# Altium PCB 电源母板.PcbDoc
Units mil, origin at the board's own origin, x right, y up, seen from the top; angles counter-clockwise.
Board outline 6000 x 4000 mil, 2 copper layers (Top Layer, Bottom Layer); 16 components, 11 nets, 72 pads, 228 vias.
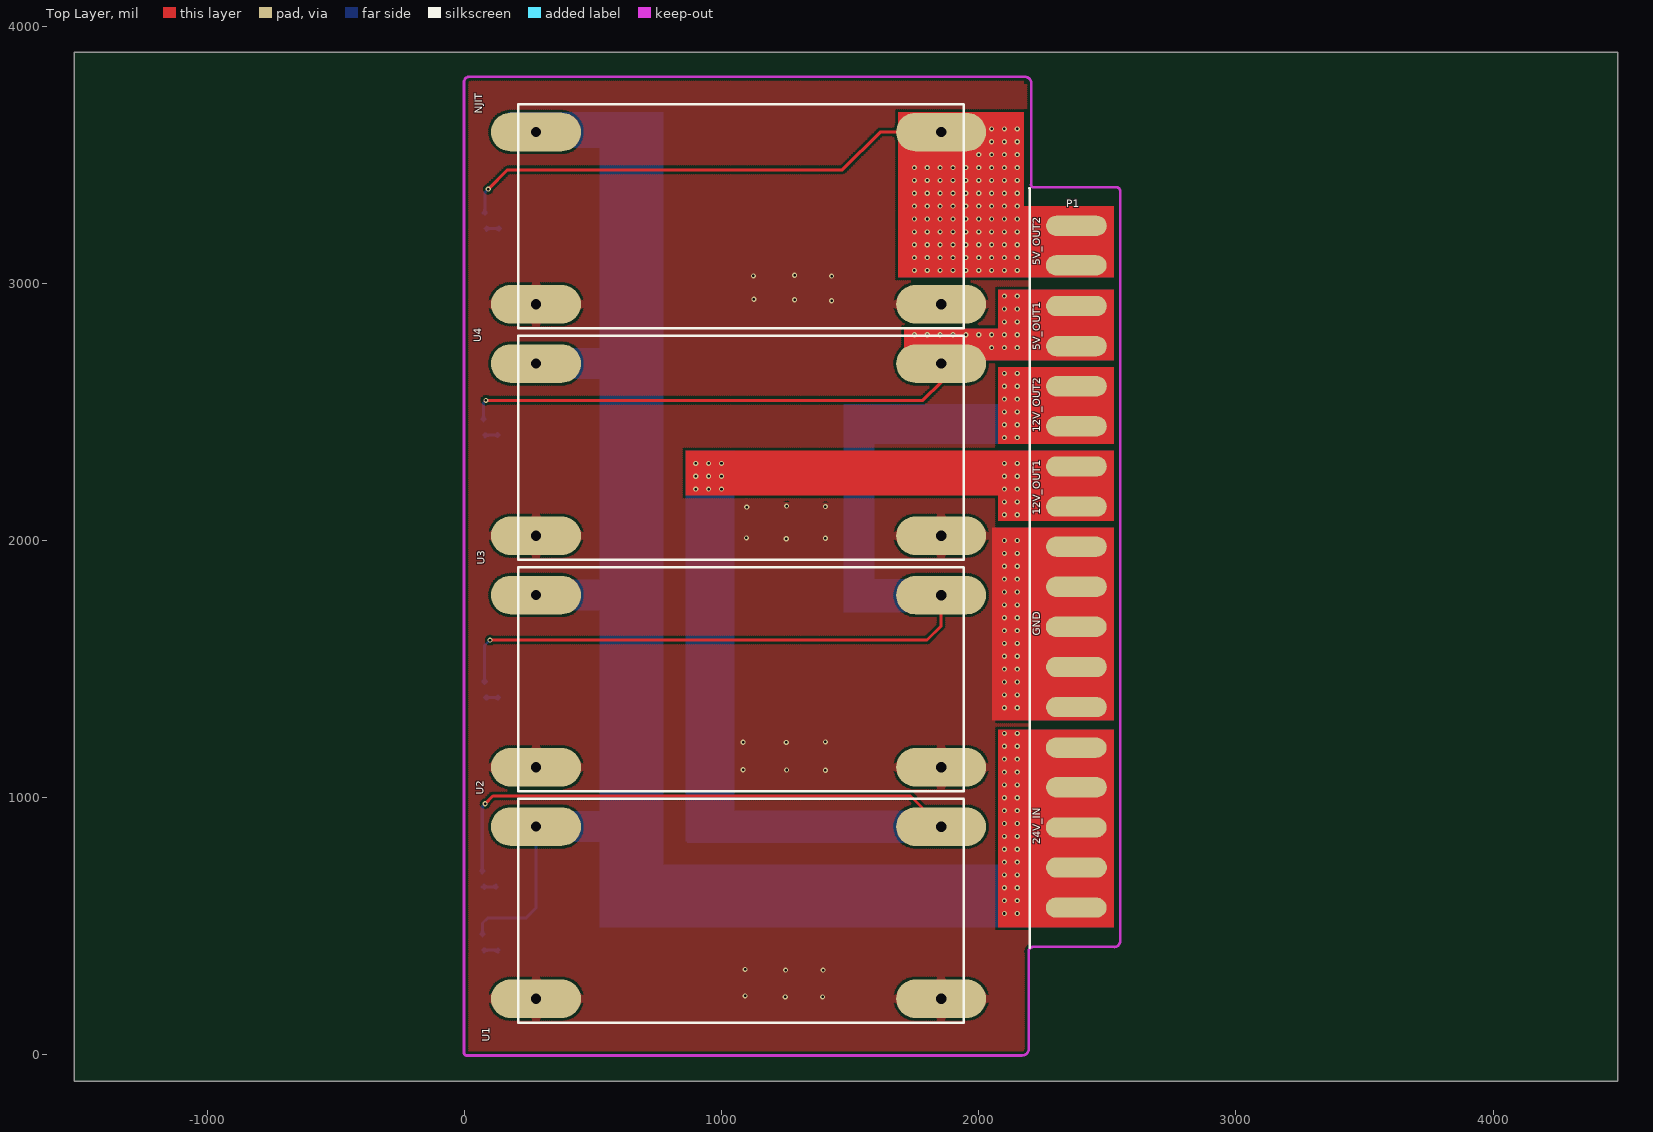
[diagram p0: Top Layer view]
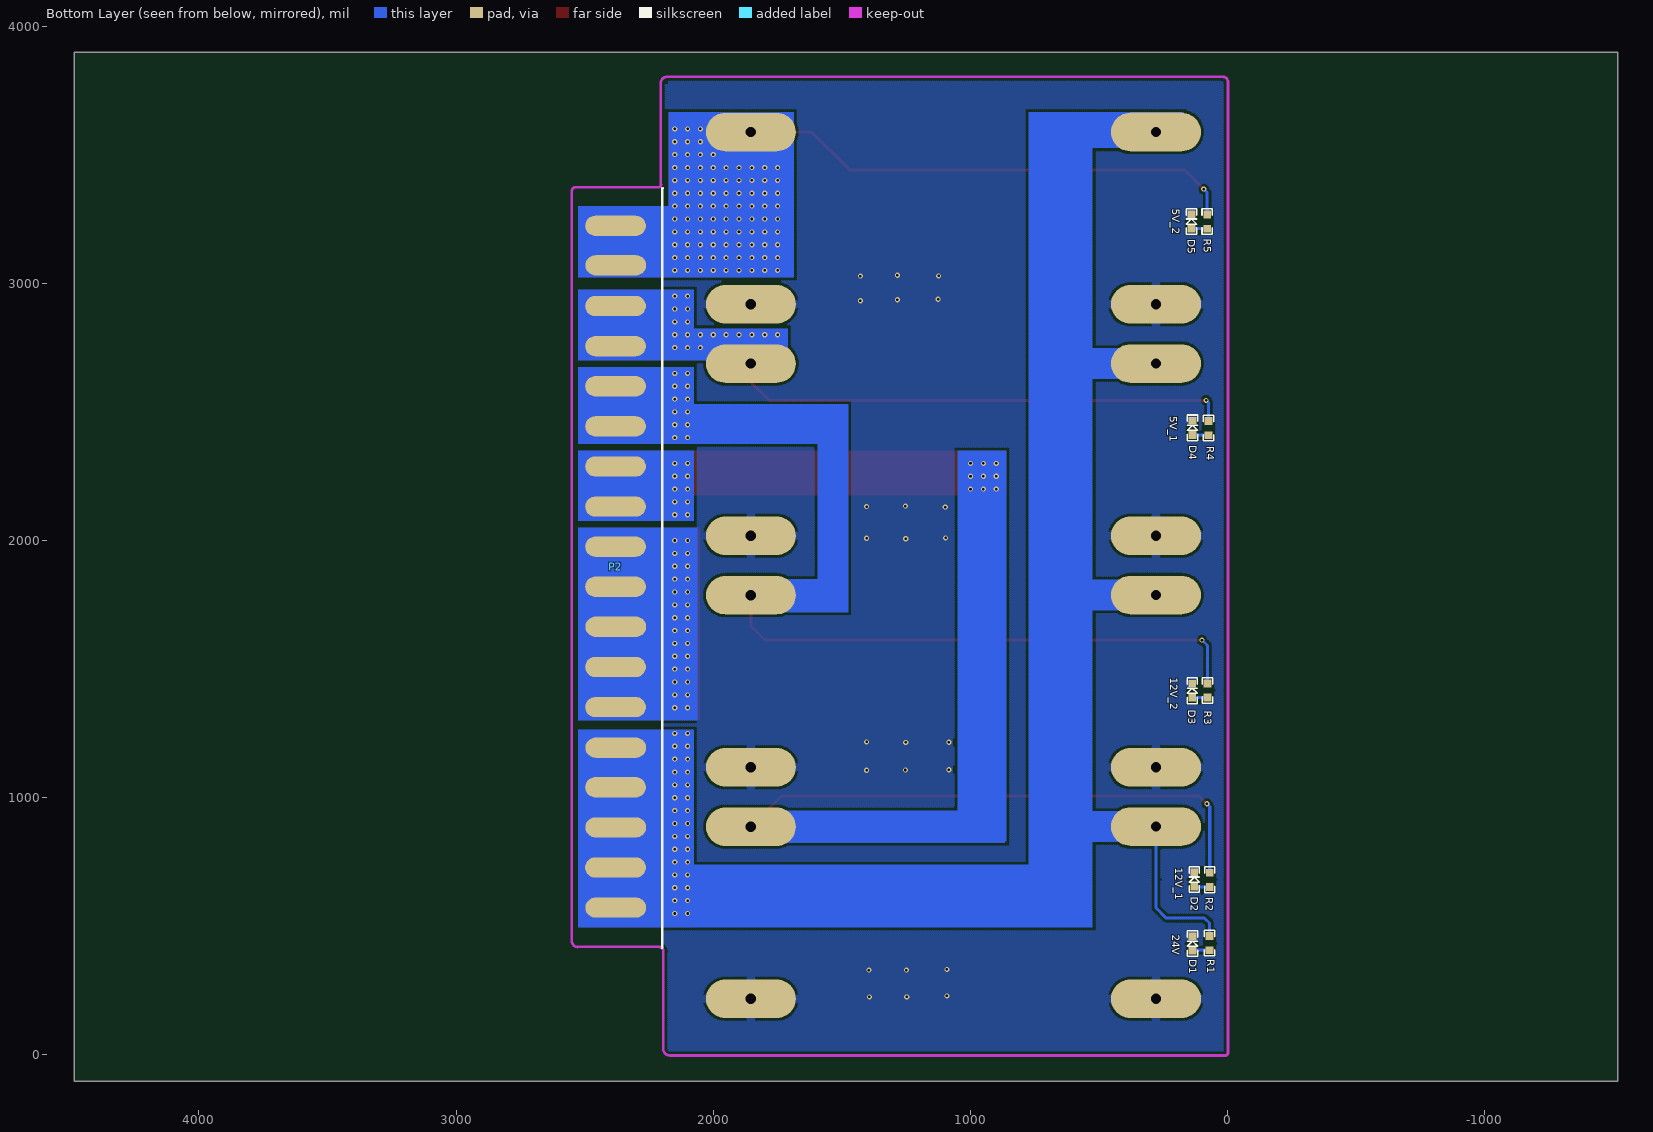
[diagram p1: Bottom Layer view, seen from below]

## Layer stack, top to bottom
Top Layer: signal copper 1.4
Dielectric: dielectric 12.6, FR-4, Dk 4.8
Bottom Layer: signal copper 1.4

## Board outline
-1516,-102 4484,-102 4484,3898 -1516,3898

## Design rules (kind name [scope] priority, off if disabled: settings)
Clearance [All] p1: gap=10
PlaneConnect [All] p1: planeconnectstyle=Relief reliefexpansion=20 reliefentries=4 reliefconductorwidth=30 reliefairgap=20
PolygonConnect [All] p1: connectstyle=Relief reliefconductorwidth=30 reliefentries=4 polygonreliefangle="90 Angle"
RoutingVias [All] p1: holewidth=28 width=50 viastyle="Through Hole" minholewidth=28 minwidth=50 maxholewidth=28 maxwidth=50
SilkscreenOverComponentPads [All] p1: minsilkscreentomaskgap=10
SolderMaskExpansion [All] p1: expansion=4
Width [All] p1: maxlimit=200 minlimit=10 preferedwidth=30
26 further rules are at their usual default settings.

## Components (designator, comment, footprint, x,y, rotation, side; value= is the part's Value field where it differs from the comment)
D1 "D_LED 3MM" 0603_LED 137,433 r90 bottom
D2 "D_LED 3MM" 0603_LED 130,682 r90 bottom
D3 "D_LED 3MM" 0603_LED 138,1416 r90 bottom
D4 "D_LED 3MM" 0603_LED 137,2438 r90 bottom
D5 "D_LED 3MM" 0603_LED 141,3240 r90 bottom
P1 "正" 1X16#1 2379,573 r0 top
P2 "反" 1X16#2 2379,573 r0 bottom
R1 "RES" 0603 71,435 r90 bottom
R2 "RES" 0603 70,681 r90 bottom
R3 "RES" 0603 79,1417 r90 bottom
R4 "RES" 0603 75,2437 r90 bottom
R5 "RES" 0603 80,3240 r90 bottom
U1 "12V" LM2596稳压模块 279,888 r90 top
U2 "12V" LM2596稳压模块 279,1788 r90 top
U3 "5V" LM2596稳压模块 279,2688 r90 top
U4 "5V" LM2596稳压模块 279,3588 r90 top

## Footprints (in the part's own frame and the unit in brackets; to place one, negate y for a bottom-side part, rotate by r counter-clockwise, add the part's x,y. Pads: shape width x height; smd on the part's side, far side on the other; paste and mask are expansions set on the pad)
1X16#1 [mm]
  oval 6x2 smd: 1(0,0) 2(0.024,3.96) 3(0.001,7.92) 4(0.022,11.88) 5(0,15.795) 6(0.022,19.8) 7(0.022,23.76) 8(0,27.733) 9(0.022,31.68) 10(0.022,35.64) 11(0.022,39.6) 12(0.022,43.56) 13(0.022,47.52) 14(0.022,51.48) 15(0.022,55.44) 16(0.022,59.4) 17(0,63.42) 18(0.022,67.32)
  silkscreen extent -4.62,-3.96 -4.61,71.04
1X16#2 [mm]
  oval 6x2 smd: 1(0,0) 2(0.024,-3.96) 3(0.001,-7.92) 4(0.022,-11.88) 5(0,-15.795) 6(0.022,-19.8) 7(0.022,-23.76) 8(0,-27.733) 9(0.022,-31.68) 10(0.022,-35.64) 11(0.022,-39.6) 12(0.022,-43.56) 13(0.022,-47.52) 14(0.022,-51.48) 15(0.022,-55.44) 16(0.022,-59.4) 17(0,-63.42) 18(0.022,-67.32)
  silkscreen extent -4.62,-71.04 -4.61,3.96
0603 [mil] "Chip Inductor, 2-Leads, Body 1.6x0.8mm, IPC Medium Density"
  rect 30x30 smd: 1(-27.5,0) 2(27.5,0)
  silkscreen extent -50,-20 50,20
0603_LED [mil]
  rect 30x30 smd: 1(-27.5,0) 2(27.5,0)
  silkscreen extent -50,-20 50,20
LM2596稳压模块 [mm]
  oval 3.81x8.89 hole 1.016: 1(0,0) 2(-17,0) 3(-0.005,-40) 4(-17,-40)
  silkscreen extent -19.39,-42.25 2.75,1.75

## Part data
P1 P2: library part 1X18, "1X18"
U1 U2 U3 U4: library part 稳压模块, "稳压模块"

## Via types
v1: diameter 20, hole 10, Top Layer to Bottom Layer, 228 vias

## Nets (pads, with @x,y where several pads share a name; then routed paths per layer and width w, separated by ;. In a path a pad name is that pad's centre, name@x,y a point inside that pad or via, vN(x,y) a via of type N, cw(c..) or ccw(c..) an arc to the next point about the centre after c; other vN are vias at no path point)
5V_OUT1: P1.15 P1.16 P2.15 P2.16 R4.2 U3.3 | length 2091.9
  Top Layer w12: v1(84,2545) 1783,2545 1853.8,2615.8 U3.3
  Bottom Layer w12: R4.2 75,2536 v1(84,2545) ; R4.2@68.64,2470.86 ccw(c53.27,2486.23) 75,2486.23 ; R4.2@68.64,2470.86 ccw(c53.27,2486.23) 75,2486.23 ; R4.2@68.64,2470.86 ccw(c53.27,2486.23) 75,2486.23 ; R4.2@68.64,2470.86 ccw(c53.27,2486.23) 75,2486.23 ; 75,2486.23 ccw(c96.73,2486.23) R4.2@81.36,2470.86 ; 75,2486.23 ccw(c96.73,2486.23) R4.2@81.36,2470.86 ; 75,2486.23 ccw(c96.73,2486.23) R4.2@81.36,2470.86 ; 75,2486.23 ccw(c96.73,2486.23) R4.2@81.36,2470.86
  other v1: 2050,2750 2100,2750 2150,2750 1750,2800 1800,2800 1850,2800 1900,2800 1950,2800 2000,2800 2050,2800 2100,2800 2150,2800 2100,2850 2150,2850 2100,2900 2150,2900 2100,2950 2150,2950
5V_OUT2: P1.17 P1.18 P2.17 P2.18 R5.2 U4.3 | length 2093.1
  Top Layer w12: v1(93,3366) 168,3441 1470,3441 1616.8,3587.8 U4.3
  Bottom Layer w12: R5.2 80,3353 v1(93,3366) ; R5.2@73.64,3273.86 ccw(c58.27,3289.23) 80,3289.23 ; R5.2@73.64,3273.86 ccw(c58.27,3289.23) 80,3289.23 ; R5.2@73.64,3273.86 ccw(c58.27,3289.23) 80,3289.23 ; R5.2@73.64,3273.86 ccw(c58.27,3289.23) 80,3289.23 ; 80,3289.23 ccw(c101.73,3289.23) R5.2@86.36,3273.86 ; 80,3289.23 ccw(c101.73,3289.23) R5.2@86.36,3273.86 ; 80,3289.23 ccw(c101.73,3289.23) R5.2@86.36,3273.86 ; 80,3289.23 ccw(c101.73,3289.23) R5.2@86.36,3273.86
  other v1: 1750,3050 1800,3050 1850,3050 1900,3050 1950,3050 2000,3050 2050,3050 2100,3050 2150,3050 1750,3100 1800,3100 1850,3100 1900,3100 1950,3100 2000,3100 2050,3100 2050,3100 2100,3100 2150,3100 1750,3150 1800,3150 1850,3150 1900,3150 1950,3150 2000,3150 2050,3150 2100,3150 2150,3150 1750,3200 1800,3200 1850,3200 1900,3200 1950,3200 2000,3200 2050,3200 2100,3200 2150,3200 1750,3250 1800,3250 1850,3250 1900,3250 1950,3250 2000,3250 2050,3250 2100,3250 2150,3250 1750,3300 1800,3300 1850,3300 1900,3300 1950,3300 2000,3300 2050,3300 2100,3300 2150,3300 1750,3350 1800,3350 1850,3350 1900,3350 1950,3350 2000,3350 2050,3350 2100,3350 2150,3350 1750,3400 1800,3400 1850,3400 1900,3400 1950,3400 2000,3400 2050,3400 2100,3400 2150,3400 1750,3450 1800,3450 1850,3450 1900,3450 1950,3450 2000,3450 2050,3450 2100,3450 2150,3450 2000,3500 2000,3500 2050,3500 2100,3500 2150,3500 2050,3550 2100,3550 2150,3550 2050,3600 2100,3600 2150,3600
12V_OUT1: P1.11 P1.12 P2.11 P2.12 R2.2 U1.3 | length 2244.2
  Top Layer w12: v1(81,977) 111,1007 1734.61,1007 U1.3
  Bottom Layer w12: R2.2 70,966 v1(81,977) ; R2.2@63.64,714.86 ccw(c48.27,730.23) 70,730.23 ; R2.2@63.64,714.86 ccw(c48.27,730.23) 70,730.23 ; R2.2@63.64,714.86 ccw(c48.27,730.23) 70,730.23 ; R2.2@63.64,714.86 ccw(c48.27,730.23) 70,730.23 ; 70,730.23 ccw(c91.73,730.23) R2.2@76.36,714.86 ; 70,730.23 ccw(c91.73,730.23) R2.2@76.36,714.86 ; 70,730.23 ccw(c91.73,730.23) R2.2@76.36,714.86 ; 70,730.23 ccw(c91.73,730.23) R2.2@76.36,714.86
  other v1: 2100,2100 2150,2100 2100,2150 2150,2150 900,2200 950,2200 1000,2200 2100,2200 2150,2200 900,2250 950,2250 1000,2250 2100,2250 2150,2250 900,2300 950,2300 1000,2300 2100,2300 2150,2300
12V_OUT2: P1.13 P1.14 P2.13 P2.14 R3.2 U2.3 | length 2210.2
  Top Layer w12: v1(100,1613) 1799,1613 1853.8,1667.8 U2.3
  Bottom Layer w12: R3.2 79,1592 v1(100,1613) ; R3.2@72.64,1450.86 ccw(c57.27,1466.23) 79,1466.23 ; R3.2@72.64,1450.86 ccw(c57.27,1466.23) 79,1466.23 ; R3.2@72.64,1450.86 ccw(c57.27,1466.23) 79,1466.23 ; R3.2@72.64,1450.86 ccw(c57.27,1466.23) 79,1466.23 ; 79,1466.23 ccw(c100.73,1466.23) R3.2@85.36,1450.86 ; 79,1466.23 ccw(c100.73,1466.23) R3.2@85.36,1450.86 ; 79,1466.23 ccw(c100.73,1466.23) R3.2@85.36,1450.86 ; 79,1466.23 ccw(c100.73,1466.23) R3.2@85.36,1450.86
  other v1: 2100,2400 2150,2400 2100,2450 2150,2450 2100,2500 2150,2500 2100,2550 2150,2550 2100,2600 2150,2600 2100,2650 2150,2650
24V_IN: P1.1 P1.2 P1.3 P1.4 P1.5 P2.1 P2.2 P2.3 P2.4 P2.5 R1.2 U1.1 U2.1 U3.1 U4.1 | length 1690.3
  Bottom Layer w12: R1.2 71,513 90,532 239,532 279,572 U1.1 ; R1.2@64.64,468.86 ccw(c49.27,484.23) 71,484.23 ; R1.2@64.64,468.86 ccw(c49.27,484.23) 71,484.23 ; R1.2@64.64,468.86 ccw(c49.27,484.23) 71,484.23 ; 71,484.23 ccw(c92.73,484.23) R1.2@77.36,468.86 ; 71,484.23 ccw(c92.73,484.23) R1.2@77.36,468.86 ; 71,484.23 ccw(c92.73,484.23) R1.2@77.36,468.86
  Bottom Layer w120: U1.1 602,888 ; U2.1 597,1788 ; U3.1 627,2688
  other v1: 2100,550 2150,550 2100,600 2150,600 2100,650 2150,650 2100,700 2150,700 2100,750 2150,750 2100,800 2150,800 2100,850 2150,850 2100,900 2150,900 2100,950 2150,950 2100,1000 2150,1000 2100,1050 2150,1050 2100,1100 2150,1100 2100,1150 2150,1150 2100,1200 2150,1200 2100,1250 2150,1250
GND: D1.2 D2.2 D3.2 D4.2 D5.2 P1.6 P1.7 P1.8 P1.9 P1.10 P2.6 P2.7 P2.8 P2.9 P2.10 U1.2 U1.4 U2.2 U2.4 U3.2 U3.4 U4.2 U4.4
  other v1: 1248,226 1393,226 1092,230 1249,330 1395,330 1092,333 1404,1107 1253,1108 1084,1109 1252,1215 1084,1216 1404,1217 2100,1350 2150,1350 2100,1400 2150,1400 2100,1450 2150,1450 2100,1500 2150,1500 2100,1550 2150,1550 2100,1600 2150,1600 2100,1650 2150,1650 2100,1700 2150,1700 2100,1750 2150,1750 2100,1800 2150,1800 2100,1850 2150,1850 2100,1900 2150,1900 2100,1950 2150,1950 2100,2000 2150,2000 1252,2007 1404,2009 1097,2010 1098,2130 1404,2132 1253,2134 1428,2932 1284,2936 1126,2938 1428,3028 1124,3029 1284,3031
NetD1_1: D1.1 R1.1 | length 337
  Bottom Layer w12: R1.1 D1.1@135,407.5 ; R1.1@77.36,401.14 cw(c92.73,385.77) 92.73,407.5 ; R1.1@77.36,401.14 cw(c92.73,385.77) 92.73,407.5 ; R1.1@77.36,401.14 cw(c92.73,385.77) 92.73,407.5 ; R1.1@77.36,401.14 cw(c92.73,385.77) 92.73,407.5 ; R1.1@77.36,413.86 ccw(c92.73,429.23) 92.73,407.5 ; R1.1@77.36,413.86 ccw(c92.73,429.23) 92.73,407.5 ; R1.1@77.36,413.86 ccw(c92.73,429.23) 92.73,407.5 ; R1.1@77.36,413.86 ccw(c92.73,429.23) 92.73,407.5 ; 110.44,407.5 cw(c110.44,378.94) D1.1@130.64,399.14 ; 110.44,407.5 cw(c110.44,378.94) D1.1@130.64,399.14 ; 110.44,407.5 cw(c110.44,378.94) D1.1@130.64,399.14 ; 110.44,407.5 cw(c110.44,378.94) D1.1@130.64,399.14 ; 120.1,407.5 ccw(c120.1,422.4) D1.1@130.64,411.86 ; 120.1,407.5 ccw(c120.1,422.4) D1.1@130.64,411.86 ; 120.1,407.5 ccw(c120.1,422.4) D1.1@130.64,411.86 ; 120.1,407.5 ccw(c120.1,422.4) D1.1@130.64,411.86
NetD2_1: D2.1 R2.1 | length 332
  Bottom Layer w12: R2.1 D2.1@129,653.5 ; R2.1@76.36,647.14 cw(c91.73,631.77) 91.73,653.5 ; R2.1@76.36,647.14 cw(c91.73,631.77) 91.73,653.5 ; R2.1@76.36,647.14 cw(c91.73,631.77) 91.73,653.5 ; R2.1@76.36,647.14 cw(c91.73,631.77) 91.73,653.5 ; R2.1@76.36,659.86 ccw(c91.73,675.23) 91.73,653.5 ; R2.1@76.36,659.86 ccw(c91.73,675.23) 91.73,653.5 ; R2.1@76.36,659.86 ccw(c91.73,675.23) 91.73,653.5 ; R2.1@76.36,659.86 ccw(c91.73,675.23) 91.73,653.5 ; 105.86,653.5 ccw(c105.86,678.64) D2.1@123.64,660.86 ; 105.86,653.5 ccw(c105.86,678.64) D2.1@123.64,660.86 ; 105.86,653.5 ccw(c105.86,678.64) D2.1@123.64,660.86 ; 105.86,653.5 ccw(c105.86,678.64) D2.1@123.64,660.86 ; 110.69,653.5 cw(c110.69,635.19) D2.1@123.64,648.14 ; 110.69,653.5 cw(c110.69,635.19) D2.1@123.64,648.14 ; 110.69,653.5 cw(c110.69,635.19) D2.1@123.64,648.14 ; 110.69,653.5 cw(c110.69,635.19) D2.1@123.64,648.14
NetD3_1: D3.1 R3.1 | length 331
  Bottom Layer w12: R3.1 D3.1@137,1389.5 ; R3.1@85.36,1383.14 cw(c100.73,1367.77) 100.73,1389.5 ; R3.1@85.36,1383.14 cw(c100.73,1367.77) 100.73,1389.5 ; R3.1@85.36,1383.14 cw(c100.73,1367.77) 100.73,1389.5 ; R3.1@85.36,1383.14 cw(c100.73,1367.77) 100.73,1389.5 ; R3.1@85.36,1395.86 ccw(c100.73,1411.23) 100.73,1389.5 ; R3.1@85.36,1395.86 ccw(c100.73,1411.23) 100.73,1389.5 ; R3.1@85.36,1395.86 ccw(c100.73,1411.23) 100.73,1389.5 ; R3.1@85.36,1395.86 ccw(c100.73,1411.23) 100.73,1389.5 ; 113.86,1389.5 cw(c113.86,1364.36) D3.1@131.64,1382.14 ; 113.86,1389.5 cw(c113.86,1364.36) D3.1@131.64,1382.14 ; 113.86,1389.5 cw(c113.86,1364.36) D3.1@131.64,1382.14 ; 113.86,1389.5 cw(c113.86,1364.36) D3.1@131.64,1382.14 ; 118.69,1389.5 ccw(c118.69,1407.81) D3.1@131.64,1394.86 ; 118.69,1389.5 ccw(c118.69,1407.81) D3.1@131.64,1394.86 ; 118.69,1389.5 ccw(c118.69,1407.81) D3.1@131.64,1394.86 ; 118.69,1389.5 ccw(c118.69,1407.81) D3.1@131.64,1394.86
NetD4_1: D4.1 R4.1 | length 334
  Bottom Layer w12: R4.1 D4.1@136,2409.5 ; R4.1@81.36,2403.14 cw(c96.73,2387.77) 96.73,2409.5 ; R4.1@81.36,2403.14 cw(c96.73,2387.77) 96.73,2409.5 ; R4.1@81.36,2403.14 cw(c96.73,2387.77) 96.73,2409.5 ; R4.1@81.36,2403.14 cw(c96.73,2387.77) 96.73,2409.5 ; R4.1@81.36,2415.86 ccw(c96.73,2431.23) 96.73,2409.5 ; R4.1@81.36,2415.86 ccw(c96.73,2431.23) 96.73,2409.5 ; R4.1@81.36,2415.86 ccw(c96.73,2431.23) 96.73,2409.5 ; R4.1@81.36,2415.86 ccw(c96.73,2431.23) 96.73,2409.5 ; 112.86,2409.5 ccw(c112.86,2434.64) D4.1@130.64,2416.86 ; 112.86,2409.5 ccw(c112.86,2434.64) D4.1@130.64,2416.86 ; 112.86,2409.5 ccw(c112.86,2434.64) D4.1@130.64,2416.86 ; 112.86,2409.5 ccw(c112.86,2434.64) D4.1@130.64,2416.86 ; 117.69,2409.5 cw(c117.69,2391.19) D4.1@130.64,2404.14 ; 117.69,2409.5 cw(c117.69,2391.19) D4.1@130.64,2404.14 ; 117.69,2409.5 cw(c117.69,2391.19) D4.1@130.64,2404.14 ; 117.69,2409.5 cw(c117.69,2391.19) D4.1@130.64,2404.14
NetD5_1: D5.1 R5.1 | length 334
  Bottom Layer w12: R5.1 D5.1 ; R5.1@86.36,3206.14 cw(c101.73,3190.77) 101.73,3212.5 ; R5.1@86.36,3206.14 cw(c101.73,3190.77) 101.73,3212.5 ; R5.1@86.36,3206.14 cw(c101.73,3190.77) 101.73,3212.5 ; R5.1@86.36,3206.14 cw(c101.73,3190.77) 101.73,3212.5 ; R5.1@86.36,3218.86 ccw(c101.73,3234.23) 101.73,3212.5 ; R5.1@86.36,3218.86 ccw(c101.73,3234.23) 101.73,3212.5 ; R5.1@86.36,3218.86 ccw(c101.73,3234.23) 101.73,3212.5 ; R5.1@86.36,3218.86 ccw(c101.73,3234.23) 101.73,3212.5 ; 119.27,3212.5 cw(c119.27,3190.77) D5.1@134.64,3206.14 ; 119.27,3212.5 ccw(c119.27,3234.23) D5.1@134.64,3218.86 ; 119.27,3212.5 cw(c119.27,3190.77) D5.1@134.64,3206.14 ; 119.27,3212.5 ccw(c119.27,3234.23) D5.1@134.64,3218.86 ; 119.27,3212.5 cw(c119.27,3190.77) D5.1@134.64,3206.14 ; 119.27,3212.5 ccw(c119.27,3234.23) D5.1@134.64,3218.86 ; 119.27,3212.5 ccw(c119.27,3234.23) D5.1@134.64,3218.86 ; 119.27,3212.5 cw(c119.27,3190.77) D5.1@134.64,3206.14

## Polygon pours and split planes (outlines as drawn)
GND on Top Layer "Top Layer-No Net" (hatched 90Degree grid 8 track 8, remove dead copper): 0,3800 2200,3800 2200,0 0,0
GND on Bottom Layer "Top Layer-No Net" (hatched 90Degree grid 8 track 8, remove dead copper): 2200,3800 0,3800 0,0 2200,0

## Keep-outs
Keep-Out Layer:
  lines w10: -1.27,9.81 ccw(c8.48,8.6) 8.48,-1.23 ; -1,9.81 -1,3785.1 ; 0.39,3785.1 cw(c17.58,3785.1) 19.71,3802.16 ; 8.48,-2 2164.1,-2 ; 19.71,3803 94,3803 1494,3803 2179.19,3803 ; 2164.1,-1.51 ccw(c2169,23) 2194,23 2194,402.59 ; 2179.19,3803.1 cw(c2179.19,3778.1) 2204,3775 2204,3384.22 ; 2193.83,402.59 cw(c2211.48,402.59) 2210.88,420.23 ; 2203.18,3383.84 ccw(c2214.4,3384.22) 2214.4,3373 2535,3373 cw(c2535,3358.24) 2549.76,3357.98 ; 2211.48,420.24 2527.7,420.24 ; 2527.7,419.96 ccw(c2526.91,443.09) 2550.06,443.09 2550.06,3357.98

## Other copper
Top Layer:
  rectangle net GND: 2052,1300 2090,2050
  rectangle net 5V_OUT2: 1687,3023 2176,3665
  rectangle net 5V_OUT1: 1710,2700 2075,2825
  rectangle net 5V_OUT1: 1790,2700 2075,2760
  rectangle net 12V_OUT1: 860,2175 2200,2350
  rectangle net 5V_OUT2: 2075,3023 2525,3300
  rectangle net 5V_OUT1: 2075,2700 2525,2975
  rectangle net 12V_OUT2: 2075,2375 2525,2675
  rectangle net 12V_OUT1: 2075,2075 2525,2350
  rectangle net GND: 2075,1300 2525,2050
  rectangle net 24V_IN: 2075,496 2525,1266
Bottom Layer:
  rectangle net GND: 2061,1300 2090,2050
  rectangle net 5V_OUT2: 1687,3023 2175,3665
  rectangle net 24V_IN: 170,3525 775,3665
  rectangle net 12V_OUT1: 865,825 1990,950
  rectangle net 12V_OUT1: 860,830 1050,2350
  rectangle net 5V_OUT1: 1710,2700 2180,2825
  rectangle net 12V_OUT2: 1475,1720 1975,1850
  rectangle net 12V_OUT2: 1475,1725 1595,2530
  rectangle net 12V_OUT2: 1520,2375 2175,2530
  rectangle net 24V_IN: 670,495 2170,740
  rectangle net 24V_IN: 525,495 775,3625
  rectangle net 5V_OUT2: 2075,3023 2525,3300
  rectangle net 5V_OUT1: 2075,2700 2525,2975
  rectangle net 12V_OUT2: 2075,2375 2525,2675
  rectangle net 12V_OUT1: 2075,2075 2525,2350
  rectangle net GND: 2075,1300 2525,2050
  rectangle net 24V_IN: 2075,496 2525,1266

## Silkscreen, mask and mechanical layers (free items; w line width, h text height)
Top Overlay:
  text "NJIT" at 70,3660 h30 r90
  text "5V_OUT2" at 2240,3070 h30 r90
  text "5V_OUT1" at 2240,2740 h30 r90
  text "12V_OUT2" at 2240,2420 h30 r90
  text "12V_OUT1" at 2240,2100 h30 r90
  text "GND" at 2240,1630 h30 r90
  text "24V_IN" at 2240,820 h30 r90
Bottom Overlay:
  text "5V_2" at 216,3290 h30 r90
  text "5V_1" at 225,2484 h30 r90
  text "12V_2" at 224,1466 h30 r90
  text "12V_1" at 204,727 h30 r90
  text "24V" at 215,468 h30 r90